# Altium PCB PCB1.PcbDoc
Units mil, origin at the board's own origin, x right, y up, seen from the top; angles counter-clockwise.
Board outline 2620 x 1875 mil, 2 copper layers (Top Layer, Bottom Layer); 23 components, 16 nets, 64 pads, 0 vias.
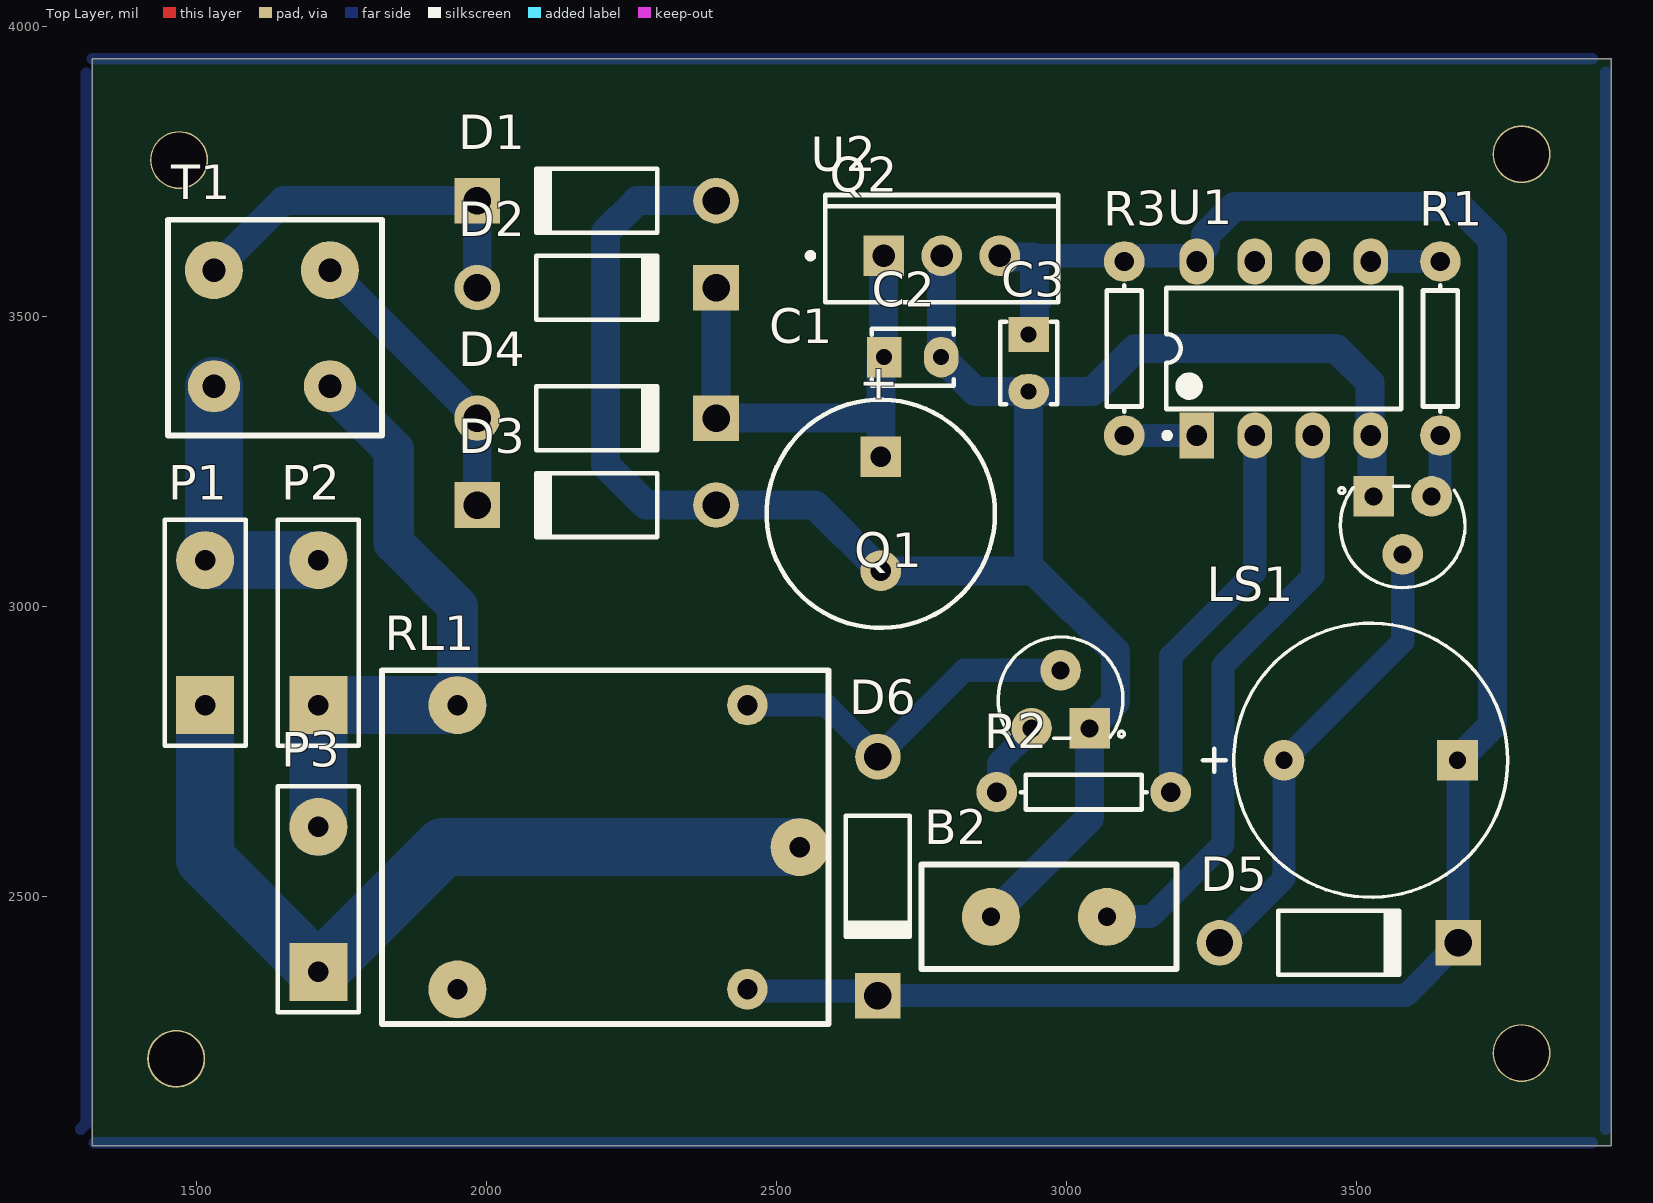
[diagram p0: Top Layer view]
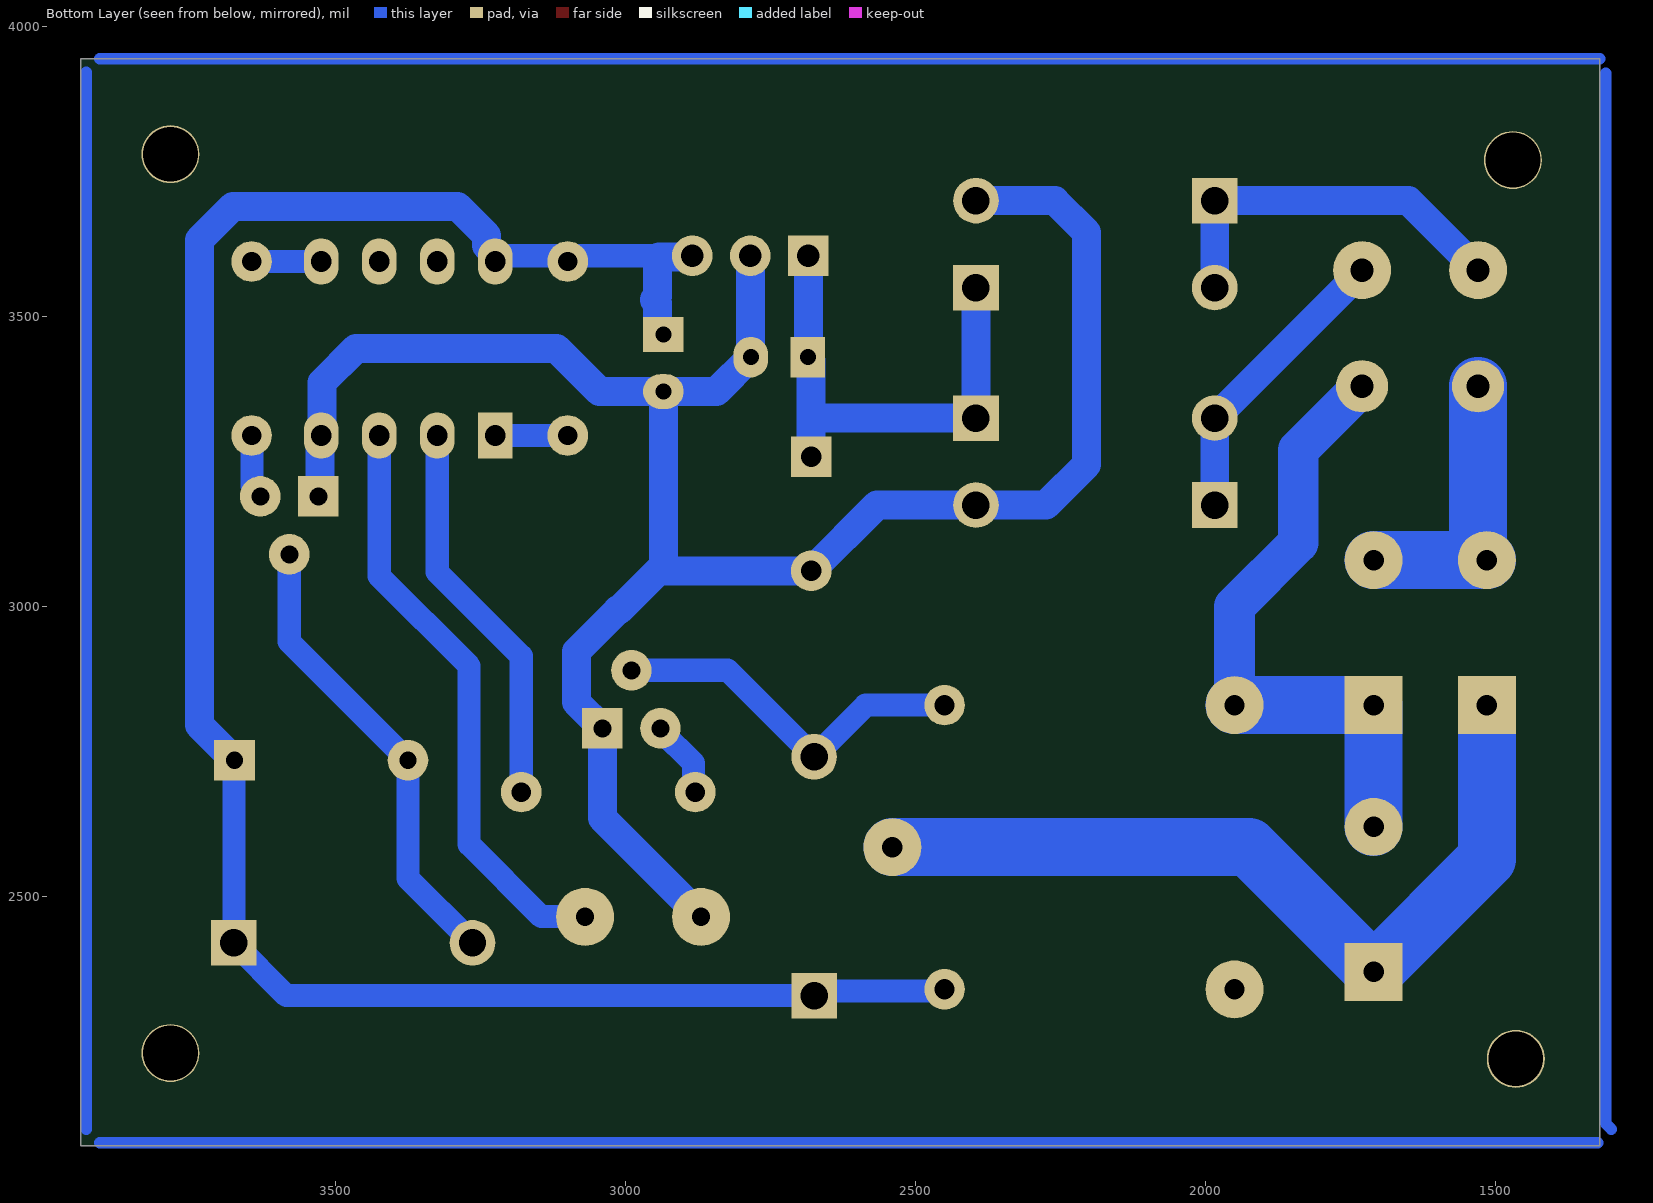
[diagram p1: Bottom Layer view, seen from below]
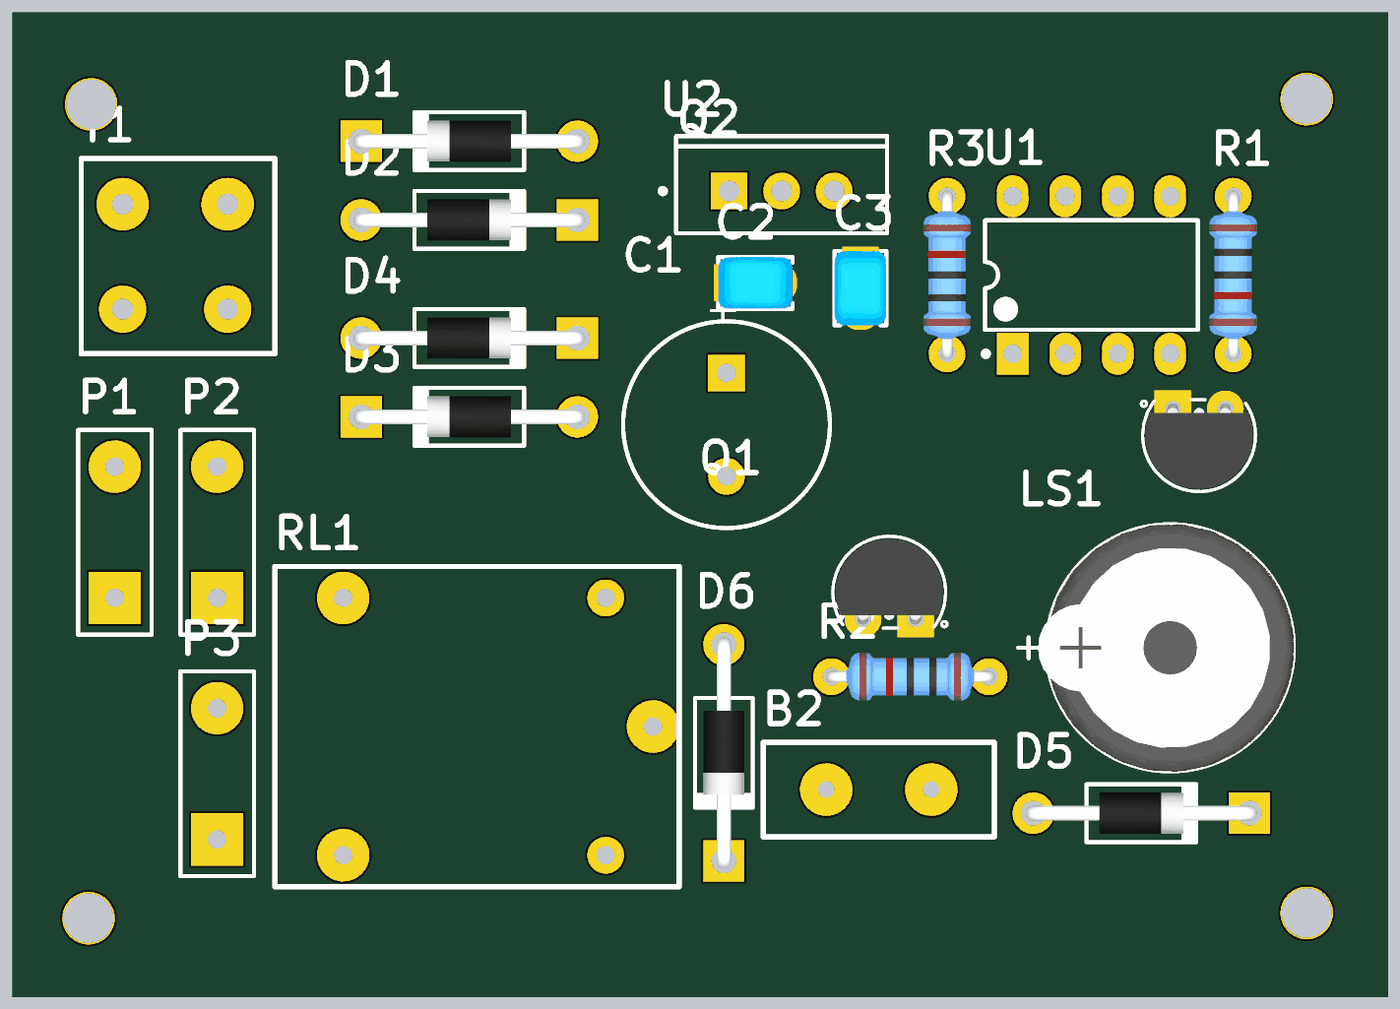
[diagram p2: 3D render of the assembled board from above, using the file's embedded part models]

## Layer stack, top to bottom
Top Solder: solder mask 0.4, Solder Resist, Dk 3.5
Top Layer: signal copper 1.4
Dielectric 1: dielectric 12.6, FR-4, Dk 4.8
Bottom Layer: signal copper 1.4
Bottom Solder: solder mask 0.4, Solder Resist, Dk 3.5

## Board outline
1320,2070 3940,2070 3940,3945 1320,3945

## Design rules (kind name [scope] priority, off if disabled: settings)
Clearance Clearance_AC [InNet('230VAC1') or InNet('230VAC2') or InNet('230VAC3')] p1: gap=10 ignorepadtopadclearanceinfootprint=FALSE except(0: Arc-Hole Track-Hole SMDPad-Hole THPad-Hole Via-Hole Fill-Hole Poly-Hole Region-Hole Text-Hole; 40: Arc-Arc Arc-Track Arc-THPad Arc-Fill Arc-Poly Arc-Region Track-Track Track-THPad Track-Fill Track-Poly Track-Region THPad-THPad THPad-Fill THPad-Poly THPad-Region Fill-Fill Fill-Poly Fill-Region Poly-Poly Poly-Region Region-Region)
Clearance [All] p2: gap=10 ignorepadtopadclearanceinfootprint=FALSE except(0: Arc-Hole Track-Hole SMDPad-Hole THPad-Hole Via-Hole Fill-Hole Poly-Hole Region-Hole Text-Hole; 30: Arc-Arc Arc-Track Arc-THPad Arc-Fill Arc-Poly Arc-Region Track-Track Track-THPad Track-Fill Track-Poly Track-Region THPad-THPad THPad-Fill THPad-Poly THPad-Region Fill-Fill Fill-Poly Fill-Region Poly-Poly Poly-Region Region-Region)
PolygonConnect [All] p1: connectstyle=Relief reliefconductorwidth=10 reliefentries=4 polygonreliefangle="90 Angle" airgapwidth=10
RoomDefinition Sheet1 [InComponentClass('Sheet1')] p1 off: confinementstyle=ConfineIn formatcopy=TRUE lockcomponents=FALSE outline 1320,2070 3940,2070 3940,3945.91 1320,3945.91
RoutingVias [All] p1: holewidth=28 width=50 viastyle="Through Hole" minholewidth=28 minwidth=50 maxholewidth=28 maxwidth=50
SolderMaskExpansion [All] p1: expansion=4 istentingtop=FALSE
Width Width_AC [InNet('230VAC1') or InNet('230VAC2') or InNet('230VAC3')] p1: maxlimit=110 minlimit=70 preferedwidth=100 minimp=50.000000 maximp=50.000000 favimp=50.000000
Width Width_PWR [InNet('+5') or InNet('GND') or InNet('9VAC1') or InNet('9VAC2') or InNet('9V')] p2: maxlimit=60 minlimit=40 preferedwidth=50 minimp=50.000000 maximp=50.000000 favimp=50.000000
Width [All] p3: maxlimit=50 minlimit=30 preferedwidth=40 minimp=50.000000 maximp=50.000000 favimp=50.000000
30 further rules are at their usual default settings.

## Components (designator, comment, footprint, x,y, rotation, side; value= is the part's Value field where it differs from the comment)
B2 "Tilt Sensor" PUSH_BTN 2970,2465 r0 top
C1 "ECA1EM102" CAPPR65-500-2000X1000X2200 2680,3160 r270 top
C2 "RCE5C1H101J0DBH03A" FP-RCE0DB-MFG 2735,3430 r0 top
C3 "RCE5C1H101J0DBH03A" FP-RCE0DB-MFG 2935,3420 r270 top
D1 "1N4007" 1N4007 2190,3700 r180 top
D2 "1N4007" 1N4007 2190,3550 r0 top
D3 "1N4007" 1N4007 2190,3175 r180 top
D4 "1N4007" 1N4007 2190,3325 r0 top
D5 "1N4007" 1N4007 3470,2420 r0 top
D6 "1N4007" 1N4007 2675,2535 r270 top
LS1 "BUZZER" FP-MCKPX-G1203A-K4056-MFG 3525,2735 r180 top
P1 "AC IN" H2_PWR_AC 1515,2830 r90 top
P2 "AC OUT" H2_PWR_AC 1710,2830 r90 top
P3 "BTN" H2_PWR_AC 1710,2370 r90 top
Q1 "C828" TO-92_ONS 2940,2790 r0 top
Q2 "C828" TO-92_ONS 3630,3190 r180 top
R1 "10K" RES 3645,3445 r90 top
R2 "10K" RES 3030,2680 r0 top
R3 "10K" RES 3100,3445 r270 top
RL1 "Relay" Relay 1950,2830 r270 top
T1 "Tansformer" TRANSFORMER 1630,3480 r90 top
U1 "ATtiny85-20PU" 8P3 3375,3445 r90 top
U2 "LM7805ACT" FAIR-TO-220-3 2785,3605 r90 top

## Footprints (in the part's own frame and the unit in brackets; to place one, negate y for a bottom-side part, rotate by r counter-clockwise, add the part's x,y. Pads: shape width x height; smd on the part's side, far side on the other; paste and mask are expansions set on the pad)
1N4007 [mm] "Diode, Axial; Body 5.2 x 2.7 mm (LxDia. max), Lead Dia. 0.86 mm (max)"
  round 2 hole 1.2: 1(-5.23,0)
  rect 2x2 hole 1.2: 2(5.23,0)
  silkscreen extent -2.65,-1.4 2.75,1.4, body extent -5.59,-1 5.58,1, height 2.02
8P3 [mil] "DIP, 8-Pin, Row Spacing 7.62 mm, Pitch 2.54 mm"
  rect 80x60 hole 35.43: 1(-150,150)
  oval 80x60 hole 35.43: 2(-150,50) 3(-150,-50) 4(-150,-150) 5(150,-150) 6(150,-50) 7(150,50) 8(150,150)
  silkscreen extent -155,-203 104,206, body extent -142,-203 142,203, height 210
CAPPR65-500-2000X1000X2200 [mil] "THD, 2-Leads, Dia 10mm, Body Length 20mm"
  rect 70x70 hole 35.43: 1(-98.43,0)
  round 70 hole 35.43: 2(98.43,0)
  silkscreen extent -197,-197 197,197, body extent -197,-197 197,197, height 866
FAIR-TO-220-3 [mil] "FM, 3-Leads, Body 10.2x4.7mm, Pitch 2.54mm"
  rect 70x70 hole 39.37: 1(0,100)
  round 70 hole 39.37: 2(0,0) 3(0,-100)
  silkscreen extent -80,-201 105,231, body extent -80,-201 105,201, height 746
FP-MCKPX-G1203A-K4056-MFG [mil]
  rect 70x70 hole 29.53 paste-39370.1 mask+0: 1(-149.61,0)
  round 70 hole 29.53 paste-39370.1 mask+0: 2(149.61,0)
  silkscreen extent -236,-236 289,236, body extent -240,-240 240,240, height 10
FP-RCE0DB-MFG [mil]
  rect 60x70 hole 27.56 paste-39370.1 mask+0: 1(-49.21,0)
  oval 60x70 hole 27.56 paste-39370.1 mask+0: 2(49.21,0)
  silkscreen extent -71,-49 71,49, body extent -77,-53 77,53, height 10
H2_PWR_AC [mm] "Connector; Header; 2 Position"
  rect 2.54x2.54 hole 0.9: 1(0,0)
  round 2.54 hole 0.9: 2(6.35,0)
  silkscreen extent -1.78,-1.78 8.13,1.78
PUSH_BTN [mm]
  round 2.54 hole 0.8: 1(-2.54,0) 2(2.54,0)
  silkscreen extent -5.59,-2.29 5.59,2.29
Relay [mil]
  round 100 hole 35: 1(245,590) 2(490,0) 3(0,0)
  round 70 hole 35: 4(0,500) 5(490,500)
  silkscreen extent -60,-130 550,640, body extent -60,-125 550,635, height 600
RES [mil] "Axial Device, Thru-Hole; 2 Leads; 0.3 in Pin Spacing"
  round 70 hole 33.46: 1(-150,0) 2(150,0)
  silkscreen extent -109,-30 109,30, body extent -161,-46 161,46, height 96
TO-92_ONS [mil]
  rect 70x70 hole 31 mask+0: 1(100,0)
  round 70 hole 31 mask+0: 2(50,100) 3(0,0)
  silkscreen extent -57,-18 160,157, body extent -52,-11 152,153, height 300
TRANSFORMER [mil]
  round 90 hole 40: 1(-100,100) 2(-100,-100)
  round 100 hole 40: 3(100,100) 4(100,-100)
  silkscreen extent -185,-190 187,179

## Part data
B2: library part "Push Button"
C1: library part CMP-1665-00045-2, "Aluminum Electrolytic Capacitor, 1000 uF, +/- 20%, 25 V, -40 to 85 degC, 2-Pin THD, RoHS, Bulk", Capacitance=1000uF, Case/Package=Radial, Dielectric Material=Aluminium, Leakage Current=3uA, Manufacturer=Panasonic, Max Operating Temperature=85degC, Min Operating Temperature=-40degC, Package Description="2-Pin Radial Lead, Dia 10 mm, Height 22 mm", Package Quantity=200, Package Reference=CAPPR65-500-2000X1000X2200, Ripple Current=850mA, Tolerance=20%, Voltage=25V, Contact Plating=Tin, Datasheet URL=https://industrial.panasonic.com/cdbs/www-data/pdf/RDF0000/ABA0000C1218.pdf, Datasheet Version="Rev. 05, 10/2016", Diameter=10mm, Dissipation Factor=0.16%, Height=20mm, Height - Seated (Max)=0.866inch, Lead Diameter=0.6mm, Lead Free=LeadFree, Lead Pitch=5mm, Lead/Base Style=Straight, Length=20mm, Life (Hours)=2000Hour, Manufacturer URL=http://www.panasonic.com/, Mount=ThroughHole, Packaging=Bulk, Polarity=Polar, Radiation Hardening=No, REACH SVHC=NoSVHC, RoHSCompliant=true, Termination=Radial, Voltage Rating=25V, Voltage Rating (DC)=25V, Width=0inch
C2 C3: library part CMP-06035-041850-1, "Cap Ceramic 100pF 50V C0G ±5% Radial 2.5mm +125°C Ammo Pack", Capacitance=100pF, Case/Package=Radial, Dielectric=C0G, Max Operating Temperature=125°C, Min Operating Temperature=-55°C, Package Quantity=2000, Ratings=AEC-Q200, Resistor Type=Ceramic, Tolerance=5%, Voltage Rating=50V, Height=3.5mm, Height - Seated (Max)=0.138inch, Lead Diameter=0.5mm, Lead Pitch=0.098inch, Lead/Base Style=Straight, Length=0.142inch, Mount="Through Hole", Packaging="Tape and Reel", Termination=Radial, Voltage Rating (DC)=50V, Width=0.098inch
D1 D2 D3 D4 D5 D6: library part "Diode 1N4007", "1 Amp General Purpose Rectifier", Code_JEDEC=DO-204-AL, ComponentLink1Description="Manufacturer Link", ComponentLink1URL=http://www.fairchildsemi.com/, ComponentLink2Description=Datasheet, ComponentLink2URL=http://www.fairchildsemi.com/ds/1N%2F1N4001.pdf, DatasheetVersion=1998, LatestRevisionDate=17-Jul-2002, LatestRevisionNote="Re-released for DXP Platform.", PackageDescription="Diode, Axial; Body 5.2 x 2.7 mm (LxDia. max), Lead Dia. 0.86 mm (max)", PackageReference=DO-41, PackageVersion=Aug-1999, Published=8-Jun-2000, Publisher="Altium Limited"
LS1: library part CMP-12433-000001-1, Current=30mA, Frequency=2300Hz, Manufacturer="Multicomp Pro", Manufacturer Part Number=MCKPX-G1203A-K4056, Max Supply Voltage=5V, Min Supply Voltage=2V, Operating Supply Voltage=3V, Package=0, Temperature="-20°C to +70°C", Temperature Range High=+70°C, Temperature Range Low=-20°C, Automotive=No, Category=Speak, ComponentLink2Description=Datasheet, ComponentLink2URL=http://www.farnell.com/datasheets/1498149.pdf?_ga=2.17855225.1157923166.1572356775-536200964.1569240579, Device Class L1=Electromechanical, Device Class L2="Audio Products", Device Class L3=Buzzers, Height=9.5mm, Lead Free=Yes, Octopart=https://octopart.com/mckpx-g1203a-k4056-multicomp-12157154, RoHS=TRUE, Standoff Height=0.5mm
P1 P2 P3: library part "Header 2", "Header, 2-Pin", LatestRevisionDate=17-Jul-2002, LatestRevisionNote="Re-released for DXP Platform.", Publisher="Altium Limited"
Q1 Q2: "NPN General Purpose Transistor", ComponentLink1Description="Manufacturer Link", ComponentLink1URL=http://www.fairchildsemi.com/, ComponentLink2Description=Datasheet, ComponentLink2URL=http://www.fairchildsemi.com/ds/2N%2F2N3904.pdf, DatasheetVersion=1997, LatestRevisionDate=15-Jan-2003, LatestRevisionNote="PCB Footprint 'BCY-W3/D4.7' replaced", PackageDescription="TO, Flat Index; 3 In-Line, Axial Leads; Body Dia. 4.5mm; Leads 0.51 x 0.48 mm (max)", PackageReference=TO-92A, PackageVersion=Sep-1998, Published=8-Jun-2000, Publisher="Altium Limited"
R1 R2 R3: library part Res1, "Resistor", LatestRevisionDate=17-Jul-2002, LatestRevisionNote="Re-released for DXP Platform.", PackageDescription="Axial Device, Thru-Hole; 2 Leads; 0.3 in Pin Spacing", PackageReference=AXIAL-0.3, Published=8-Jun-2000, Publisher="Altium Limited"
U1: library part CMP-0093-00032-2, "8-bit AVR Microcontroller, 20MHz, 2.7-5.5V, 8K Flash, 512 Bytes EEPROM, 512 Bytes SRAM, Industrial Grade (-40°C to 85°C), 8-Lead PDIP, Pb-Free", Code_JEDEC=MS-001-BA, ComponentLink1Description="Manufacturer URL", ComponentLink1URL=http://www.atmel.com/, ComponentLink2Description="ATtiny25/45/85 Datasheet", ComponentLink2URL=http://www.atmel.com/dyn/resources/prod_documents/doc2586.pdf, ComponentLink3Description="ATtiny25/45/85 Summary", ComponentLink3URL=http://www.atmel.com/dyn/resources/prod_documents/2586S.pdf, DatasheetVersion="revN, Apr-2011", PackageDescription="8-Lead, 0.300\" Wide Body, Plastic Dual In-Line Package (PDIP)", PackageReference=8P3, PackageVersion="revB, Jan-2002", RevisionNote="DatasheetVersion updated. URLs added."
U2: library part CMP-2000-04937-1, "Positive Voltage Regulator, 5 V, 1 A, 0 to 125 degC, 3-Pin TO-220, RoHS, Tube", Dropout Voltage Measurement Current=1A, Manufacturer=Fairchild, Maximum Input Voltage=35V, Maximum Operating Temperature=+125degC, Minimum Operating Temperature=0degC, Output Voltage=5V, Package Description="3-Pin Through Hole Device, Body 10 x 4.5 mm, Pitch 2.54 mm", Package Reference=TO-220, Quiescent Current=6mA, Typical Dropout Voltage @ Current=2V@1A, Datasheet URL=https://datasheet.ciiva.com/5816/1359194-5816420.pdf, Datasheet Version="Rev. 1.0.1, 05/2006", Dimensions=10.67x4.83x16.51mm, Height=16.51mm, Length=10.67mm, Line Regulation=50mV, Load Regulation=100mV, Manufacturer URL=https://www.fairchildsemi.com/, Maximum Output Current=1A, Mounting Type=ThroughHole, Number of Outputs=1, Output Type=Fixed, Package Type=TO-220, Package URL=https://www.fairchildsemi.com/package-drawings/TO/TO220B03.pdf, Pin Count=3, Polarity=Positive, Regulator Function=Linear, Series=LM78xx, Width=4.83mm

## Free pads (board coordinates)
  round 100 hole 94.49: 2(1465,2220) 2(1470,3770) 2(3785,2230) 2(3785,3780)

## Nets (pads, with @x,y where several pads share a name; then routed paths per layer and width w, separated by ;. In a path a pad name is that pad's centre, name@x,y a point inside that pad or via, vN(x,y) a via of type N, cw(c..) or ccw(c..) an arc to the next point about the centre after c; other vN are vias at no path point)
9VAC1: D1.2 D2.1 T1.3 | length 653.8
  Bottom Layer w50: T1.3 1650,3700 D1.2 D2.1
9VAC2: D3.2 D4.1 T1.4 | length 510.2
  Bottom Layer w50: T1.4 1730,3579.09 D4.1 D3.2
230VAC1: P1.2 P2.2 T1.1 | length 511.8
  Bottom Layer w40: T1.1@1522.5,3372.5 T1.1
  Bottom Layer w100: T1.1 1530,3095 P1.2 P2.2
230VAC2: P1.1 P3.1 RL1.1 | length 1459.8
  Bottom Layer w100: P1.1 1515,2565 P3.1 1925,2585 RL1.1
230VAC3: P2.1 P3.2 RL1.3 T1.2 | length 1091.1
  Bottom Layer w70: T1.2 1840,3270 1840,3110 1950,3000 RL1.3
  Bottom Layer w100: P3.2 P2.1 RL1.3
+5V: C3.1 D5.2 D6.2 LS1.1 R3.1 RL1.5 U1.8 U2.3 | length 3581.8
  Bottom Layer w40: RL1.5 2452.87,2337.13 2666.96,2337.13 D6.2 3585,2329.09 D5.2 3675.26,2420.65 3675.26,2734.35 LS1.1 ; 2945,3605 3215.76,3605 3225,3595.76 U1.8
  Bottom Layer w50: U2.3 2887.49,3602.51 2942.49,3602.51 2945,3600 2945,3534.29 2950,3529.29 2950,3528.58 2945,3523.58 2945,3479.21 C3.1 ; U1.8@3225,3595.76 3225,3607.71 3240,3622.71 3240,3640.21 3289.79,3690 3677.28,3690 3735,3632.28 3735,2795.39 LS1.1
+9V: C1.1 C2.1 D2.2 D4.2 U2.1 | length 867.5
  Bottom Layer w50: D2.2 D4.2 2675,3325 2680,3330 ; C1.1@2685,3263.43 C1.1 2680,3330 ; U2.1 2685,3430.79 C2.1 2680,3424.21 2680,3330
GND: B2.1 C1.2 C2.2 C3.2 D1.1 D3.1 Q1.1 Q2.1 U1.4 U2.2 | length 3679.7
  Bottom Layer w50: D1.1 2260,3700 2205,3645 2205,3245 2275,3175 D3.1 2566.57,3175 C1.2 2943.43,3061.57 ; U2.2 2785,3430.79 C2.2 2843.43,3370.79 C3.2 ; B2.1 3040,2635 Q1.1 3085,2835 3085,2922.28 3013.64,2993.64 3011.36,2993.64 2943.43,3061.57 ; Q2.1 3526.73,3193.27 3526.73,3293.27 U1.4 3523.27,3296.73 3523.27,3386.73 3465,3445 3119.21,3445 3045,3370.79 C3.2 ; C3.2 2935,3070 2943.43,3061.57
NetB2_2: B2.2 U1.3 | length 1021
  Bottom Layer w40: B2.2 3070.28,2465.28 3145.28,2465.28 3270,2590 3270,2897.58 3425,3052.58 U1.3
NetD5_1: D5.1 LS1.2 Q2.2 | length 800.9
  Bottom Layer w40: D5.1 3375.39,2531.3 LS1.2 3580,2939.61 Q2.2
NetD6_1: D6.1 Q1.2 RL1.4 | length 638.7
  Bottom Layer w40: RL1.4 2585.91,2830 D6.1 2824.09,2890 Q1.2
NetQ1_3: Q1.3 R2.1 | length 134.9
  Bottom Layer w40: R2.1 2882.89,2682.89 2882.89,2729.92 2940,2787.02 Q1.3
NetQ2_3: Q2.3 R1.1 | length 111.2
  Bottom Layer w40: Q2.3 3630,3192.98 3644.46,3207.44 3644.46,3294.46 R1.1
NetR1_2: R1.2 U1.5 | length 120
  Bottom Layer w40: U1.5 R1.2
NetR2_2: R2.2 U1.2 | length 675.1
  Bottom Layer w40: R2.2 3180,2914.47 3325,3059.47 U1.2
NetR3_2: R3.2 U1.1 | length 125
  Bottom Layer w40: R3.2 U1.1
pads on no net: RL1.2 U1.6 U1.7
copper on no net: | length 8818.6
  Bottom Layer w20: 1300,2098.43 1310,2108.43 1310,3920 ; 1320,3945 3906.57,3945 ; 1323.43,2075 3906.57,2075 ; 3930,2098.43 3930,3921.57

## Text inside footprints (layer, text, board x,y; h text height)
C1: Top Overlay "+" at 2650.47,3417.86 h59.06 r270
Q1: Mechanical 7 "0.165in/4.191mm" at 2630,2827.5 h25; Mechanical 7 "0.1in/2.54mm" at 2915,2652.25 h25; Mechanical 7 "0.1in/2.54mm" at 3162.5,2827.5 h25; Mechanical 7 "0.205in/5.207mm" at 2896.25,3012.5 h25; Mechanical 7 "Alt 2 Padstyle: OX90Y60D30P" at 2652.5,2314.5 h50; Mechanical 7 "Alt 1 Padstyle: OX60Y90D30P" at 2652.5,2374.5 h50; Mechanical 7 "Pin 1 Padstyle: SX51Y51D31P" at 2652.5,2434.5 h50; Mechanical 7 "Default Padstyle: EX51Y51D31P" at 2627.5,2494.5 h50; Mechanical 7 "Pinout: 1, 2, 3" at 2802.5,2554.5 h50
Q2: Mechanical 7 "0.165in/4.191mm" at 3940,3152.5 h25 r180; Mechanical 7 "0.1in/2.54mm" at 3655,3327.75 h25 r180; Mechanical 7 "0.1in/2.54mm" at 3407.5,3152.5 h25 r180; Mechanical 7 "0.205in/5.207mm" at 3673.75,2967.5 h25 r180; Mechanical 7 "Alt 2 Padstyle: OX90Y60D30P" at 3917.5,3665.5 h50 r180; Mechanical 7 "Alt 1 Padstyle: OX60Y90D30P" at 3917.5,3605.5 h50 r180; Mechanical 7 "Pin 1 Padstyle: SX51Y51D31P" at 3917.5,3545.5 h50 r180; Mechanical 7 "Default Padstyle: EX51Y51D31P" at 3942.5,3485.5 h50 r180; Mechanical 7 "Pinout: 1, 2, 3" at 3767.5,3425.5 h50 r180